# EAGLE board MicroView-ProtoPanel-v01 (EAGLE 6.5.0), part 1 of 4
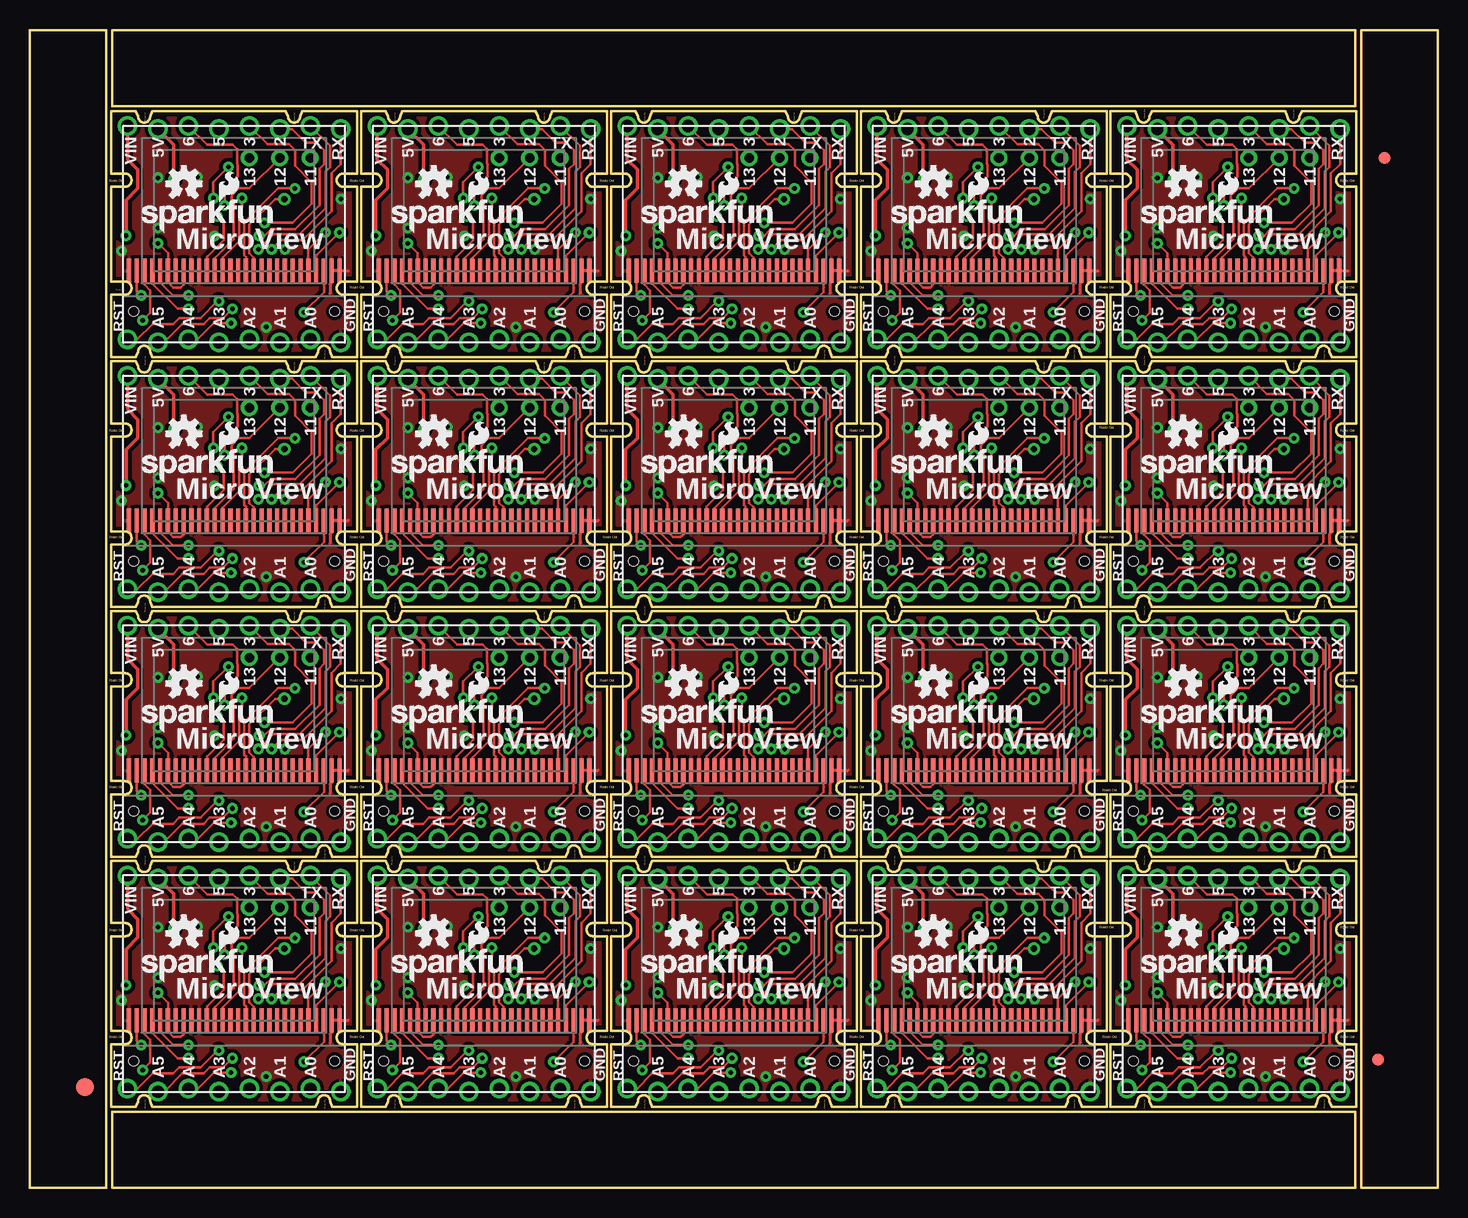
[diagram p0: board, top side]
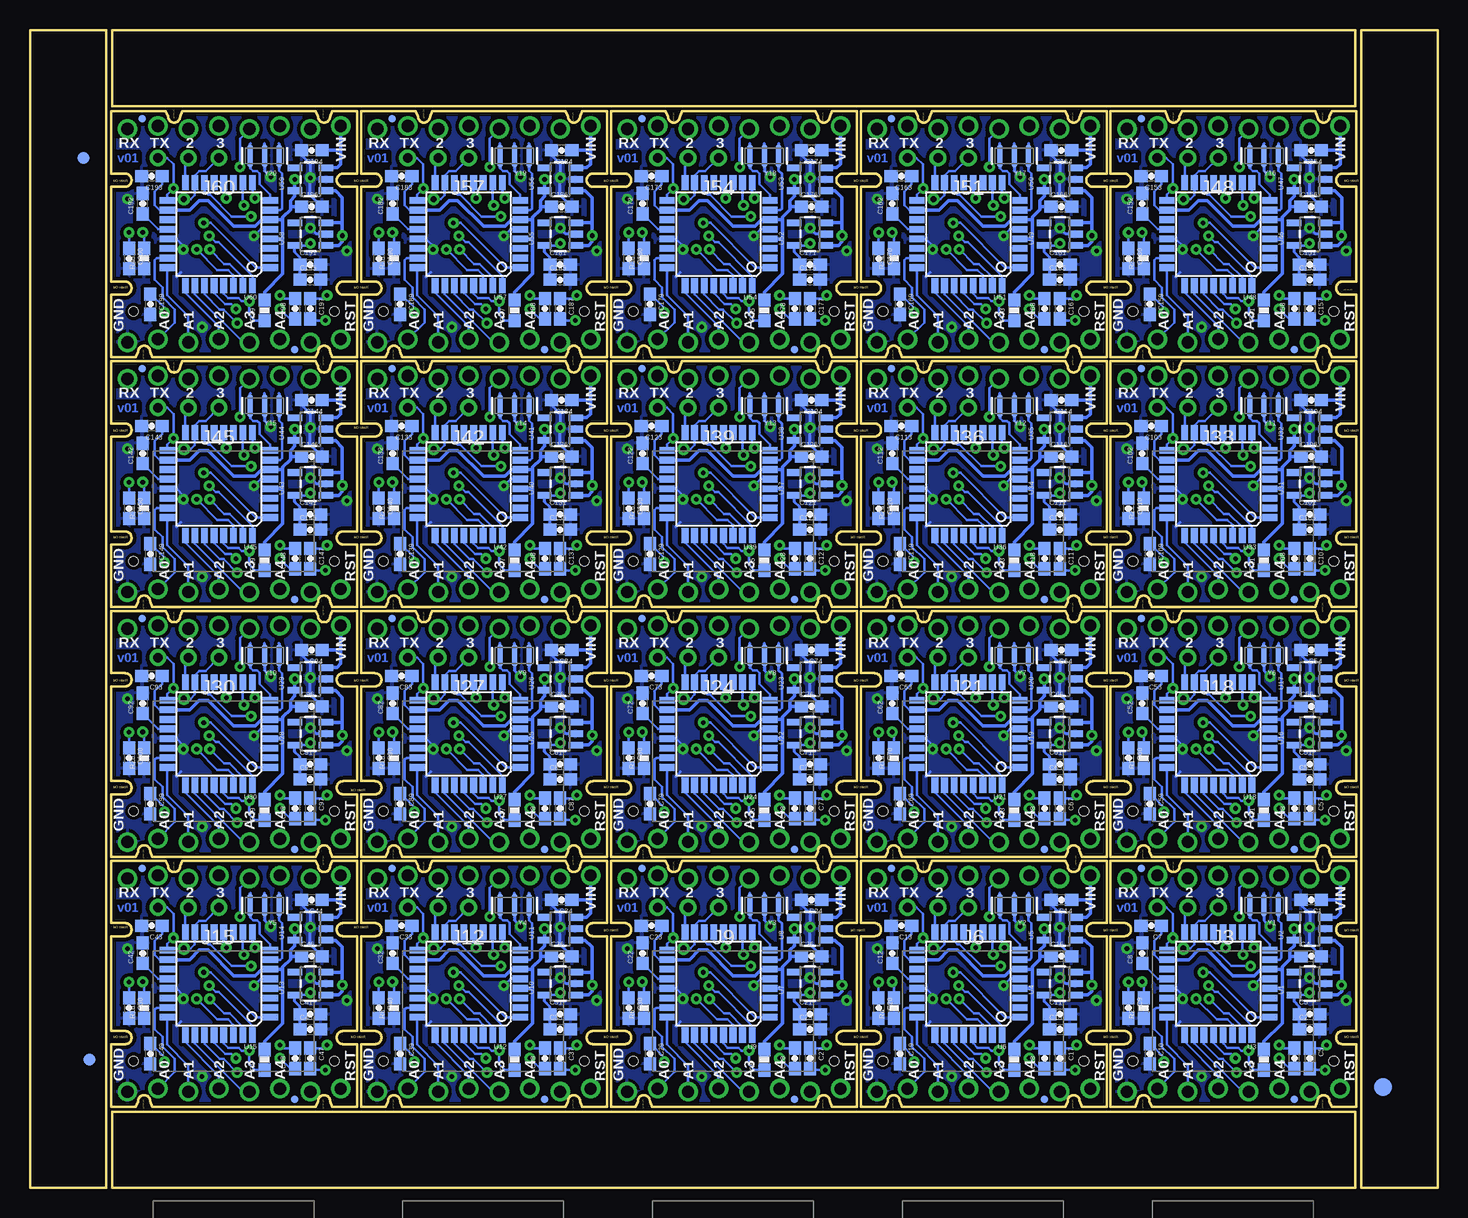
[diagram p1: board, bottom side, seen from below]

Size 117.35 x 96.52 mm. Coordinates in mm from the lower left corner, seen from the top.
Outline: 740 segments
Copper layers (1*16): Top 0.035mm / dielectric 1.5mm / Bottom 0.035mm
Design rules "SparkFun-2-layer *": minimum track width 7mil, minimum drill 15mil, track to track 8mil, track to pad 8mil, pad to pad 8mil, via to via 8mil, smd to smd 8mil, copper to edge 8mil, drill to drill 8mil, minimum pad ring 12mil, minimum via ring 10mil, stop-mask expansion 4mil, vias tented up to drill 20mil, thermal gap 10mil

## Footprints (pad centres in the part's own frame; a part is rotated, then mirrored left to right if it is on the bottom)
0603-CAP = smd 1.1 x 1: 1 -0.85,0; 2 0.85,0
FIDUCIAL-1.5X3 = smd 1.5 x 1.5: 1 0,0
FIDUCIAL-1X2 = smd 1 x 1: 1 0,0
MICRO-FIDUCIAL = smd 0.635 x 0.635: 1 0,0
MV-DIP16 = drill 1.016: 1 -8.89,-8.763; 2 -6.35,-9.017; 3 -3.81,-8.763; 4 -1.27,-9.017; 5 1.27,-8.763; 6 3.81,-9.017; 7 6.35,-8.763; 8 8.89,-9.017; 9 8.89,8.763; 10 6.35,9.017; 11 3.81,8.763; 12 1.27,9.017; 13 -1.27,8.763; 14 -3.81,9.017; 15 -6.35,8.763; 16 -8.89,9.017
1X03_NS_SLIM = drill 0.8: 1 0,0; 2 2.54,0; 3 5.08,0
OLED-0.66-64X48 = smd 0.35 x 2: 1 0,0; 2 0.65,0; 3 1.3,0; 4 1.95,0; 5 2.6,0; 6 3.25,0; 7 3.9,0; 8 4.55,0; 9 5.2,0; 10 5.85,0; 11 6.5,0; 12 7.15,0; 13 7.8,0; 14 8.45,0; 15 9.1,0; 16 9.75,0; 17 10.4,0; 18 11.05,0; 19 11.7,0; 20 12.35,0; 21 13,0; 22 13.65,0; 23 14.3,0; 24 14.95,0; 25 15.6,0; 26 16.25,0; 27 16.9,0; 28 17.55,0 | hole 0.8: 17.15,-3.4; 0.4,-3.4
0603-RES = smd 1.1 x 1: 1 -0.85,0; 2 0.85,0
SOT23-5 = smd 0.55 x 1.2: 1 -0.95,-1.3; 2 0,-1.3; 3 0.95,-1.3; 4 0.95,1.3; 5 -0.95,1.3
TQFP32-08 = smd 1.27 x 0.559: 1 -4.293,2.8; 2 -4.293,2; 3 -4.293,1.2; 4 -4.293,0.4; 5 -4.293,-0.4; 6 -4.293,-1.2; 7 -4.293,-2; 8 -4.293,-2.8; 17 4.293,-2.8; 18 4.293,-2; 19 4.293,-1.2; 20 4.293,-0.4; 21 4.293,0.4; 22 4.293,1.2; 23 4.293,2; 24 4.293,2.8 | smd 0.559 x 1.27: 9 -2.8,-4.293; 10 -2,-4.293; 11 -1.2,-4.293; 12 -0.4,-4.293; 13 0.4,-4.293; 14 1.2,-4.293; 15 2,-4.293; 16 2.8,-4.293; 25 2.8,4.293; 26 2,4.293; 27 1.2,4.293; 28 0.4,4.293; 29 -0.4,4.293; 30 -1.2,4.293; 31 -2,4.293; 32 -2.8,4.293
RESONATOR-SMD = smd 0.45 x 1.905: 1 -1.2,0; 2 0,0; 3 1.2,0

## Placement (x,y rotation side)
C1  1.0uF  [0603-CAP]  10.54,24 180 bottom
C2  1.0uF  [0603-CAP]  10.67,13.21 0 bottom
C3  0.1uF  [0603-CAP]  10.67,14.48 0 bottom
C4  1.0uF  [0603-CAP]  10.54,19.3 0 bottom
C5  1.0uF  [0603-CAP]  10.67,10.79 270 bottom
C6  1.0uF  [0603-CAP]  11.94,10.79 90 bottom
C7  0.1uF  [0603-CAP]  23.88,21.84 180 bottom
C8  0.1uF  [0603-CAP]  24.64,19.56 90 bottom
C9  2.2uF  [0603-CAP]  25.78,14.99 270 bottom
C10  2.2uF  [0603-CAP]  24,11.18 270 bottom
C11  0.1uF  [0603-CAP]  31.5,14.48 0 bottom
C12  0.1uF  [0603-CAP]  45.47,19.56 90 bottom
C13  0.1uF  [0603-CAP]  44.7,21.84 180 bottom
C14  1.0uF  [0603-CAP]  31.37,24 180 bottom
C15  1.0uF  [0603-CAP]  31.5,13.21 0 bottom
C16  1.0uF  [0603-CAP]  31.37,19.3 0 bottom
C17  1.0uF  [0603-CAP]  31.5,10.79 270 bottom
C18  1.0uF  [0603-CAP]  32.77,10.79 90 bottom
C19  2.2uF  [0603-CAP]  44.83,11.18 270 bottom
C20  2.2uF  [0603-CAP]  46.61,14.99 270 bottom
C21  0.1uF  [0603-CAP]  52.32,14.48 0 bottom
C22  0.1uF  [0603-CAP]  66.29,19.56 90 bottom
C23  0.1uF  [0603-CAP]  65.53,21.84 180 bottom
C24  1.0uF  [0603-CAP]  52.2,24 180 bottom
C25  1.0uF  [0603-CAP]  52.32,13.21 0 bottom
C26  1.0uF  [0603-CAP]  52.2,19.3 0 bottom
C27  1.0uF  [0603-CAP]  52.32,10.79 270 bottom
C28  1.0uF  [0603-CAP]  53.59,10.79 90 bottom
C29  2.2uF  [0603-CAP]  65.66,11.18 270 bottom
C30  2.2uF  [0603-CAP]  67.44,14.99 270 bottom
C31  0.1uF  [0603-CAP]  73.15,14.48 0 bottom
C32  0.1uF  [0603-CAP]  87.12,19.56 90 bottom
C33  0.1uF  [0603-CAP]  86.36,21.84 180 bottom
C34  1.0uF  [0603-CAP]  73.03,24 180 bottom
C35  1.0uF  [0603-CAP]  73.15,13.21 0 bottom
C36  1.0uF  [0603-CAP]  73.03,19.3 0 bottom
C37  1.0uF  [0603-CAP]  73.15,10.79 270 bottom
C38  1.0uF  [0603-CAP]  74.42,10.79 90 bottom
C39  2.2uF  [0603-CAP]  86.49,11.18 270 bottom
C40  2.2uF  [0603-CAP]  88.27,14.99 270 bottom
C41  0.1uF  [0603-CAP]  93.98,14.48 0 bottom
C42  0.1uF  [0603-CAP]  107.95,19.56 90 bottom
C43  0.1uF  [0603-CAP]  107.19,21.84 180 bottom
C44  1.0uF  [0603-CAP]  93.85,24 180 bottom
C45  1.0uF  [0603-CAP]  93.98,13.21 0 bottom
C46  1.0uF  [0603-CAP]  93.85,19.3 0 bottom
C47  1.0uF  [0603-CAP]  93.98,10.79 270 bottom
C48  1.0uF  [0603-CAP]  95.25,10.79 90 bottom
C49  2.2uF  [0603-CAP]  107.31,11.18 270 bottom
C50  2.2uF  [0603-CAP]  109.09,14.99 270 bottom
C51  0.1uF  [0603-CAP]  10.67,35.31 0 bottom
C52  0.1uF  [0603-CAP]  24.64,40.39 90 bottom
C53  0.1uF  [0603-CAP]  23.88,42.67 180 bottom
C54  1.0uF  [0603-CAP]  10.54,44.83 180 bottom
C55  1.0uF  [0603-CAP]  10.67,34.04 0 bottom
C56  1.0uF  [0603-CAP]  10.54,40.13 0 bottom
C57  1.0uF  [0603-CAP]  10.67,31.62 270 bottom
C58  1.0uF  [0603-CAP]  11.94,31.62 90 bottom
C59  2.2uF  [0603-CAP]  24,32 270 bottom
C60  2.2uF  [0603-CAP]  25.78,35.81 270 bottom
C61  0.1uF  [0603-CAP]  31.5,35.31 0 bottom
C62  0.1uF  [0603-CAP]  45.47,40.39 90 bottom
C63  0.1uF  [0603-CAP]  44.7,42.67 180 bottom
C64  1.0uF  [0603-CAP]  31.37,44.83 180 bottom
C65  1.0uF  [0603-CAP]  31.5,34.04 0 bottom
C66  1.0uF  [0603-CAP]  31.37,40.13 0 bottom
C67  1.0uF  [0603-CAP]  31.5,31.62 270 bottom
C68  1.0uF  [0603-CAP]  32.77,31.62 90 bottom
C69  2.2uF  [0603-CAP]  44.83,32 270 bottom
C70  2.2uF  [0603-CAP]  46.61,35.81 270 bottom
C71  0.1uF  [0603-CAP]  52.32,35.31 0 bottom
C72  0.1uF  [0603-CAP]  66.29,40.39 90 bottom
C73  0.1uF  [0603-CAP]  65.53,42.67 180 bottom
C74  1.0uF  [0603-CAP]  52.2,44.83 180 bottom
C75  1.0uF  [0603-CAP]  52.32,34.04 0 bottom
C76  1.0uF  [0603-CAP]  52.2,40.13 0 bottom
C77  1.0uF  [0603-CAP]  52.32,31.62 270 bottom
C78  1.0uF  [0603-CAP]  53.59,31.62 90 bottom
C79  2.2uF  [0603-CAP]  65.66,32 270 bottom
C80  2.2uF  [0603-CAP]  67.44,35.81 270 bottom
C81  0.1uF  [0603-CAP]  73.15,35.31 0 bottom
C82  0.1uF  [0603-CAP]  87.12,40.39 90 bottom
C83  0.1uF  [0603-CAP]  86.36,42.67 180 bottom
C84  1.0uF  [0603-CAP]  73.03,44.83 180 bottom
C85  1.0uF  [0603-CAP]  73.15,34.04 0 bottom
C86  1.0uF  [0603-CAP]  73.03,40.13 0 bottom
C87  1.0uF  [0603-CAP]  73.15,31.62 270 bottom
C88  1.0uF  [0603-CAP]  74.42,31.62 90 bottom
C89  2.2uF  [0603-CAP]  86.49,32 270 bottom
C90  2.2uF  [0603-CAP]  88.27,35.81 270 bottom
C91  0.1uF  [0603-CAP]  93.98,35.31 0 bottom
C92  0.1uF  [0603-CAP]  107.95,40.39 90 bottom
C93  0.1uF  [0603-CAP]  107.19,42.67 180 bottom
C94  1.0uF  [0603-CAP]  93.85,44.83 180 bottom
C95  1.0uF  [0603-CAP]  93.98,34.04 0 bottom
C96  1.0uF  [0603-CAP]  93.85,40.13 0 bottom
C97  1.0uF  [0603-CAP]  93.98,31.62 270 bottom
C98  1.0uF  [0603-CAP]  95.25,31.62 90 bottom
C99  2.2uF  [0603-CAP]  107.31,32 270 bottom
C100  2.2uF  [0603-CAP]  109.09,35.81 270 bottom
C101  0.1uF  [0603-CAP]  10.67,56.13 0 bottom
C102  0.1uF  [0603-CAP]  24.64,61.21 90 bottom
C103  0.1uF  [0603-CAP]  23.88,63.5 180 bottom
C104  1.0uF  [0603-CAP]  10.54,65.66 180 bottom
C105  1.0uF  [0603-CAP]  10.67,54.86 0 bottom
C106  1.0uF  [0603-CAP]  10.54,60.96 0 bottom
C107  1.0uF  [0603-CAP]  10.67,52.45 270 bottom
C108  1.0uF  [0603-CAP]  11.94,52.45 90 bottom
C109  2.2uF  [0603-CAP]  24,52.83 270 bottom
C110  2.2uF  [0603-CAP]  25.78,56.64 270 bottom
C111  0.1uF  [0603-CAP]  31.5,56.13 0 bottom
C112  0.1uF  [0603-CAP]  45.47,61.21 90 bottom
C113  0.1uF  [0603-CAP]  44.7,63.5 180 bottom
C114  1.0uF  [0603-CAP]  31.37,65.66 180 bottom
C115  1.0uF  [0603-CAP]  31.5,54.86 0 bottom
C116  1.0uF  [0603-CAP]  31.37,60.96 0 bottom
C117  1.0uF  [0603-CAP]  31.5,52.45 270 bottom
C118  1.0uF  [0603-CAP]  32.77,52.45 90 bottom
C119  2.2uF  [0603-CAP]  44.83,52.83 270 bottom
C120  2.2uF  [0603-CAP]  46.61,56.64 270 bottom
C121  0.1uF  [0603-CAP]  52.32,56.13 0 bottom
C122  0.1uF  [0603-CAP]  66.29,61.21 90 bottom
C123  0.1uF  [0603-CAP]  65.53,63.5 180 bottom
C124  1.0uF  [0603-CAP]  52.2,65.66 180 bottom
C125  1.0uF  [0603-CAP]  52.32,54.86 0 bottom
C126  1.0uF  [0603-CAP]  52.2,60.96 0 bottom
C127  1.0uF  [0603-CAP]  52.32,52.45 270 bottom
C128  1.0uF  [0603-CAP]  53.59,52.45 90 bottom
C129  2.2uF  [0603-CAP]  65.66,52.83 270 bottom
C130  2.2uF  [0603-CAP]  67.44,56.64 270 bottom
C131  0.1uF  [0603-CAP]  73.15,56.13 0 bottom
C132  0.1uF  [0603-CAP]  87.12,61.21 90 bottom
C133  0.1uF  [0603-CAP]  86.36,63.5 180 bottom
C134  1.0uF  [0603-CAP]  73.03,65.66 180 bottom
C135  1.0uF  [0603-CAP]  73.15,54.86 0 bottom
C136  1.0uF  [0603-CAP]  73.03,60.96 0 bottom
C137  1.0uF  [0603-CAP]  73.15,52.45 270 bottom
C138  1.0uF  [0603-CAP]  74.42,52.45 90 bottom
C139  2.2uF  [0603-CAP]  86.49,52.83 270 bottom
C140  2.2uF  [0603-CAP]  88.27,56.64 270 bottom
C141  0.1uF  [0603-CAP]  93.98,56.13 0 bottom
C142  0.1uF  [0603-CAP]  107.95,61.21 90 bottom
C143  0.1uF  [0603-CAP]  107.19,63.5 180 bottom
C144  1.0uF  [0603-CAP]  93.85,65.66 180 bottom
C145  1.0uF  [0603-CAP]  93.98,54.86 0 bottom
C146  1.0uF  [0603-CAP]  93.85,60.96 0 bottom
C147  1.0uF  [0603-CAP]  93.98,52.45 270 bottom
C148  1.0uF  [0603-CAP]  95.25,52.45 90 bottom
C149  2.2uF  [0603-CAP]  107.31,52.83 270 bottom
C150  2.2uF  [0603-CAP]  109.09,56.64 270 bottom
C151  0.1uF  [0603-CAP]  10.67,76.96 0 bottom
C152  0.1uF  [0603-CAP]  24.64,82.04 90 bottom
C153  0.1uF  [0603-CAP]  23.88,84.33 180 bottom
C154  1.0uF  [0603-CAP]  10.54,86.49 180 bottom
C155  1.0uF  [0603-CAP]  10.67,75.69 0 bottom
C156  1.0uF  [0603-CAP]  10.54,81.79 0 bottom
C157  1.0uF  [0603-CAP]  10.67,73.28 270 bottom
C158  1.0uF  [0603-CAP]  11.94,73.28 90 bottom
C159  2.2uF  [0603-CAP]  24,73.66 270 bottom
C160  2.2uF  [0603-CAP]  25.78,77.47 270 bottom
C161  0.1uF  [0603-CAP]  31.5,76.96 0 bottom
C162  0.1uF  [0603-CAP]  45.47,82.04 90 bottom
C163  0.1uF  [0603-CAP]  44.7,84.33 180 bottom
C164  1.0uF  [0603-CAP]  31.37,86.49 180 bottom
C165  1.0uF  [0603-CAP]  31.5,75.69 0 bottom
C166  1.0uF  [0603-CAP]  31.37,81.79 0 bottom
C167  1.0uF  [0603-CAP]  31.5,73.28 270 bottom
C168  1.0uF  [0603-CAP]  32.77,73.28 90 bottom
C169  2.2uF  [0603-CAP]  44.83,73.66 270 bottom
C170  2.2uF  [0603-CAP]  46.61,77.47 270 bottom
C171  0.1uF  [0603-CAP]  52.32,76.96 0 bottom
C172  0.1uF  [0603-CAP]  66.29,82.04 90 bottom
C173  0.1uF  [0603-CAP]  65.53,84.33 180 bottom
C174  1.0uF  [0603-CAP]  52.2,86.49 180 bottom
C175  1.0uF  [0603-CAP]  52.32,75.69 0 bottom
C176  1.0uF  [0603-CAP]  52.2,81.79 0 bottom
C177  1.0uF  [0603-CAP]  52.32,73.28 270 bottom
C178  1.0uF  [0603-CAP]  53.59,73.28 90 bottom
C179  2.2uF  [0603-CAP]  65.66,73.66 270 bottom
C180  2.2uF  [0603-CAP]  67.44,77.47 270 bottom
C181  0.1uF  [0603-CAP]  73.15,76.96 0 bottom
C182  0.1uF  [0603-CAP]  87.12,82.04 90 bottom
C183  0.1uF  [0603-CAP]  86.36,84.33 180 bottom
C184  1.0uF  [0603-CAP]  73.03,86.49 180 bottom
C185  1.0uF  [0603-CAP]  73.15,75.69 0 bottom
C186  1.0uF  [0603-CAP]  73.03,81.79 0 bottom
C187  1.0uF  [0603-CAP]  73.15,73.28 270 bottom
C188  1.0uF  [0603-CAP]  74.42,73.28 90 bottom
C189  2.2uF  [0603-CAP]  86.49,73.66 270 bottom
C190  2.2uF  [0603-CAP]  88.27,77.47 270 bottom
C191  0.1uF  [0603-CAP]  93.98,76.96 0 bottom
C192  0.1uF  [0603-CAP]  107.95,82.04 90 bottom
C193  0.1uF  [0603-CAP]  107.19,84.33 180 bottom
C194  1.0uF  [0603-CAP]  93.85,86.49 180 bottom
C195  1.0uF  [0603-CAP]  93.98,75.69 0 bottom
C196  1.0uF  [0603-CAP]  93.85,81.79 0 bottom
C197  1.0uF  [0603-CAP]  93.98,73.28 270 bottom
C198  1.0uF  [0603-CAP]  95.25,73.28 90 bottom
C199  2.2uF  [0603-CAP]  107.31,73.66 270 bottom
C200  2.2uF  [0603-CAP]  109.09,77.47 270 bottom
E$1  [FIDUCIAL-1.5X3]  4.57,8.38 0 top
E$2  [FIDUCIAL-1.5X3]  4.57,8.38 0 bottom
E$3  [FIDUCIAL-1X2]  112.39,10.67 0 bottom
E$4  [FIDUCIAL-1X2]  112.39,10.67 0 top
E$5  [FIDUCIAL-1X2]  112.9,85.85 180 top
E$6  [FIDUCIAL-1X2]  112.9,85.85 180 bottom
FID1  FIDUCIALUFIDUCIAL  [MICRO-FIDUCIAL]  24.69,26.64 0 bottom
FID2  FIDUCIALUFIDUCIAL  [MICRO-FIDUCIAL]  45.52,26.64 0 bottom
FID3  FIDUCIALUFIDUCIAL  [MICRO-FIDUCIAL]  11.96,7.39 0 bottom
FID4  FIDUCIALUFIDUCIAL  [MICRO-FIDUCIAL]  32.79,7.39 0 bottom
FID5  FIDUCIALUFIDUCIAL  [MICRO-FIDUCIAL]  66.34,26.64 0 bottom
FID6  FIDUCIALUFIDUCIAL  [MICRO-FIDUCIAL]  53.62,7.39 0 bottom
FID7  FIDUCIALUFIDUCIAL  [MICRO-FIDUCIAL]  87.17,26.64 0 bottom
FID8  FIDUCIALUFIDUCIAL  [MICRO-FIDUCIAL]  74.45,7.39 0 bottom
FID9  FIDUCIALUFIDUCIAL  [MICRO-FIDUCIAL]  108,26.64 0 bottom
FID10  FIDUCIALUFIDUCIAL  [MICRO-FIDUCIAL]  95.28,7.39 0 bottom
FID11  FIDUCIALUFIDUCIAL  [MICRO-FIDUCIAL]  24.69,47.47 0 bottom
FID12  FIDUCIALUFIDUCIAL  [MICRO-FIDUCIAL]  11.96,28.22 0 bottom
FID13  FIDUCIALUFIDUCIAL  [MICRO-FIDUCIAL]  45.52,47.47 0 bottom
FID14  FIDUCIALUFIDUCIAL  [MICRO-FIDUCIAL]  32.79,28.22 0 bottom
FID15  FIDUCIALUFIDUCIAL  [MICRO-FIDUCIAL]  66.34,47.47 0 bottom
FID16  FIDUCIALUFIDUCIAL  [MICRO-FIDUCIAL]  53.62,28.22 0 bottom
FID17  FIDUCIALUFIDUCIAL  [MICRO-FIDUCIAL]  87.17,47.47 0 bottom
FID18  FIDUCIALUFIDUCIAL  [MICRO-FIDUCIAL]  74.45,28.22 0 bottom
FID19  FIDUCIALUFIDUCIAL  [MICRO-FIDUCIAL]  108,47.47 0 bottom
FID20  FIDUCIALUFIDUCIAL  [MICRO-FIDUCIAL]  95.28,28.22 0 bottom
FID21  FIDUCIALUFIDUCIAL  [MICRO-FIDUCIAL]  24.69,68.3 0 bottom
FID22  FIDUCIALUFIDUCIAL  [MICRO-FIDUCIAL]  11.96,49.05 0 bottom
FID23  FIDUCIALUFIDUCIAL  [MICRO-FIDUCIAL]  45.52,68.3 0 bottom
FID24  FIDUCIALUFIDUCIAL  [MICRO-FIDUCIAL]  32.79,49.05 0 bottom
FID25  FIDUCIALUFIDUCIAL  [MICRO-FIDUCIAL]  66.34,68.3 0 bottom
FID26  FIDUCIALUFIDUCIAL  [MICRO-FIDUCIAL]  53.62,49.05 0 bottom
FID27  FIDUCIALUFIDUCIAL  [MICRO-FIDUCIAL]  87.17,68.3 0 bottom
FID28  FIDUCIALUFIDUCIAL  [MICRO-FIDUCIAL]  74.45,49.05 0 bottom
FID29  FIDUCIALUFIDUCIAL  [MICRO-FIDUCIAL]  108,68.3 0 bottom
FID30  FIDUCIALUFIDUCIAL  [MICRO-FIDUCIAL]  95.28,49.05 0 bottom
FID31  FIDUCIALUFIDUCIAL  [MICRO-FIDUCIAL]  24.69,89.13 0 bottom
FID32  FIDUCIALUFIDUCIAL  [MICRO-FIDUCIAL]  11.96,69.88 0 bottom
FID33  FIDUCIALUFIDUCIAL  [MICRO-FIDUCIAL]  45.52,89.13 0 bottom
FID34  FIDUCIALUFIDUCIAL  [MICRO-FIDUCIAL]  32.79,69.88 0 bottom
FID35  FIDUCIALUFIDUCIAL  [MICRO-FIDUCIAL]  66.34,89.13 0 bottom
FID36  FIDUCIALUFIDUCIAL  [MICRO-FIDUCIAL]  53.62,69.88 0 bottom
FID37  FIDUCIALUFIDUCIAL  [MICRO-FIDUCIAL]  87.17,89.13 0 bottom
FID38  FIDUCIALUFIDUCIAL  [MICRO-FIDUCIAL]  74.45,69.88 0 bottom
FID39  FIDUCIALUFIDUCIAL  [MICRO-FIDUCIAL]  108,89.13 0 bottom
FID40  FIDUCIALUFIDUCIAL  [MICRO-FIDUCIAL]  95.28,69.88 0 bottom
J1  OLED_SCREEN  [OLED-SCREEN]  17.02,17.02 0 top
J2  MICROVIEW-16  [MV-DIP16]  17.02,17.02 0 top
J3  M03NS_SLIM  [1X03_NS_SLIM]  18.29,23.37 180 bottom
J4  MICROVIEW-16  [MV-DIP16]  37.85,17.02 0 top
J5  OLED_SCREEN  [OLED-SCREEN]  37.85,17.02 0 top
J6  M03NS_SLIM  [1X03_NS_SLIM]  39.12,23.37 180 bottom
J7  MICROVIEW-16  [MV-DIP16]  58.67,17.02 0 top
J8  OLED_SCREEN  [OLED-SCREEN]  58.67,17.02 0 top
J9  M03NS_SLIM  [1X03_NS_SLIM]  59.94,23.37 180 bottom
J10  MICROVIEW-16  [MV-DIP16]  79.5,17.02 0 top
J11  OLED_SCREEN  [OLED-SCREEN]  79.5,17.02 0 top
J12  M03NS_SLIM  [1X03_NS_SLIM]  80.77,23.37 180 bottom
J13  MICROVIEW-16  [MV-DIP16]  100.33,17.02 0 top
J14  OLED_SCREEN  [OLED-SCREEN]  100.33,17.02 0 top
J15  M03NS_SLIM  [1X03_NS_SLIM]  101.6,23.37 180 bottom
J16  MICROVIEW-16  [MV-DIP16]  17.02,37.85 0 top
J17  OLED_SCREEN  [OLED-SCREEN]  17.02,37.85 0 top
J18  M03NS_SLIM  [1X03_NS_SLIM]  18.29,44.2 180 bottom
J19  MICROVIEW-16  [MV-DIP16]  37.85,37.85 0 top
J20  OLED_SCREEN  [OLED-SCREEN]  37.85,37.85 0 top
J21  M03NS_SLIM  [1X03_NS_SLIM]  39.12,44.2 180 bottom
J22  MICROVIEW-16  [MV-DIP16]  58.67,37.85 0 top
J23  OLED_SCREEN  [OLED-SCREEN]  58.67,37.85 0 top
J24  M03NS_SLIM  [1X03_NS_SLIM]  59.94,44.2 180 bottom
J25  MICROVIEW-16  [MV-DIP16]  79.5,37.85 0 top
J26  OLED_SCREEN  [OLED-SCREEN]  79.5,37.85 0 top
J27  M03NS_SLIM  [1X03_NS_SLIM]  80.77,44.2 180 bottom
J28  MICROVIEW-16  [MV-DIP16]  100.33,37.85 0 top
J29  OLED_SCREEN  [OLED-SCREEN]  100.33,37.85 0 top
J30  M03NS_SLIM  [1X03_NS_SLIM]  101.6,44.2 180 bottom
J31  MICROVIEW-16  [MV-DIP16]  17.02,58.67 0 top
J32  OLED_SCREEN  [OLED-SCREEN]  17.02,58.67 0 top
J33  M03NS_SLIM  [1X03_NS_SLIM]  18.29,65.02 180 bottom
J34  MICROVIEW-16  [MV-DIP16]  37.85,58.67 0 top
J35  OLED_SCREEN  [OLED-SCREEN]  37.85,58.67 0 top
J36  M03NS_SLIM  [1X03_NS_SLIM]  39.12,65.02 180 bottom
J37  MICROVIEW-16  [MV-DIP16]  58.67,58.67 0 top
J38  OLED_SCREEN  [OLED-SCREEN]  58.67,58.67 0 top
J39  M03NS_SLIM  [1X03_NS_SLIM]  59.94,65.02 180 bottom
J40  MICROVIEW-16  [MV-DIP16]  79.5,58.67 0 top
J41  OLED_SCREEN  [OLED-SCREEN]  79.5,58.67 0 top
J42  M03NS_SLIM  [1X03_NS_SLIM]  80.77,65.02 180 bottom
J43  MICROVIEW-16  [MV-DIP16]  100.33,58.67 0 top
J44  OLED_SCREEN  [OLED-SCREEN]  100.33,58.67 0 top
J45  M03NS_SLIM  [1X03_NS_SLIM]  101.6,65.02 180 bottom
J46  MICROVIEW-16  [MV-DIP16]  17.02,79.5 0 top
J47  OLED_SCREEN  [OLED-SCREEN]  17.02,79.5 0 top
J48  M03NS_SLIM  [1X03_NS_SLIM]  18.29,85.85 180 bottom
J49  MICROVIEW-16  [MV-DIP16]  37.85,79.5 0 top
J50  OLED_SCREEN  [OLED-SCREEN]  37.85,79.5 0 top
J51  M03NS_SLIM  [1X03_NS_SLIM]  39.12,85.85 180 bottom
J52  MICROVIEW-16  [MV-DIP16]  58.67,79.5 0 top
J53  OLED_SCREEN  [OLED-SCREEN]  58.67,79.5 0 top
J54  M03NS_SLIM  [1X03_NS_SLIM]  59.94,85.85 180 bottom
J55  MICROVIEW-16  [MV-DIP16]  79.5,79.5 0 top
J56  OLED_SCREEN  [OLED-SCREEN]  79.5,79.5 0 top
J57  M03NS_SLIM  [1X03_NS_SLIM]  80.77,85.85 180 bottom
J58  MICROVIEW-16  [MV-DIP16]  100.33,79.5 0 top
J59  OLED_SCREEN  [OLED-SCREEN]  100.33,79.5 0 top
J60  M03NS_SLIM  [1X03_NS_SLIM]  101.6,85.85 180 bottom
LOGO1  OSHW-LOGOS  [OSHW-LOGO-S]  12.83,21.21 0 top
LOGO2  OSHW-LOGOS  [OSHW-LOGO-S]  33.66,21.21 0 top
LOGO3  SFE_LOGO_NAME_FLAME.1_INCH  [SFE_LOGO_NAME_FLAME_.1]  29.72,17.02 0 top
LOGO4  SFE_LOGO_NAME_FLAME.1_INCH  [SFE_LOGO_NAME_FLAME_.1]  8.89,17.02 0 top
LOGO5  OSHW-LOGOS  [OSHW-LOGO-S]  54.48,21.21 0 top
LOGO6  SFE_LOGO_NAME_FLAME.1_INCH  [SFE_LOGO_NAME_FLAME_.1]  50.55,17.02 0 top
LOGO7  OSHW-LOGOS  [OSHW-LOGO-S]  75.31,21.21 0 top
LOGO8  SFE_LOGO_NAME_FLAME.1_INCH  [SFE_LOGO_NAME_FLAME_.1]  71.37,17.02 0 top
LOGO9  OSHW-LOGOS  [OSHW-LOGO-S]  96.14,21.21 0 top
LOGO10  SFE_LOGO_NAME_FLAME.1_INCH  [SFE_LOGO_NAME_FLAME_.1]  92.2,17.02 0 top
LOGO11  OSHW-LOGOS  [OSHW-LOGO-S]  12.83,42.04 0 top
LOGO12  SFE_LOGO_NAME_FLAME.1_INCH  [SFE_LOGO_NAME_FLAME_.1]  8.89,37.85 0 top
LOGO13  OSHW-LOGOS  [OSHW-LOGO-S]  33.66,42.04 0 top
LOGO14  SFE_LOGO_NAME_FLAME.1_INCH  [SFE_LOGO_NAME_FLAME_.1]  29.72,37.85 0 top
LOGO15  OSHW-LOGOS  [OSHW-LOGO-S]  54.48,42.04 0 top
LOGO16  SFE_LOGO_NAME_FLAME.1_INCH  [SFE_LOGO_NAME_FLAME_.1]  50.55,37.85 0 top
LOGO17  OSHW-LOGOS  [OSHW-LOGO-S]  75.31,42.04 0 top
LOGO18  SFE_LOGO_NAME_FLAME.1_INCH  [SFE_LOGO_NAME_FLAME_.1]  71.37,37.85 0 top
LOGO19  OSHW-LOGOS  [OSHW-LOGO-S]  96.14,42.04 0 top
LOGO20  SFE_LOGO_NAME_FLAME.1_INCH  [SFE_LOGO_NAME_FLAME_.1]  92.2,37.85 0 top
LOGO21  OSHW-LOGOS  [OSHW-LOGO-S]  12.83,62.87 0 top
LOGO22  SFE_LOGO_NAME_FLAME.1_INCH  [SFE_LOGO_NAME_FLAME_.1]  8.89,58.67 0 top
LOGO23  OSHW-LOGOS  [OSHW-LOGO-S]  33.66,62.87 0 top
LOGO24  SFE_LOGO_NAME_FLAME.1_INCH  [SFE_LOGO_NAME_FLAME_.1]  29.72,58.67 0 top
LOGO25  OSHW-LOGOS  [OSHW-LOGO-S]  54.48,62.87 0 top
LOGO26  SFE_LOGO_NAME_FLAME.1_INCH  [SFE_LOGO_NAME_FLAME_.1]  50.55,58.67 0 top
LOGO27  OSHW-LOGOS  [OSHW-LOGO-S]  75.31,62.87 0 top
LOGO28  SFE_LOGO_NAME_FLAME.1_INCH  [SFE_LOGO_NAME_FLAME_.1]  71.37,58.67 0 top
LOGO29  OSHW-LOGOS  [OSHW-LOGO-S]  96.14,62.87 0 top
LOGO30  SFE_LOGO_NAME_FLAME.1_INCH  [SFE_LOGO_NAME_FLAME_.1]  92.2,58.67 0 top
LOGO31  OSHW-LOGOS  [OSHW-LOGO-S]  12.83,83.69 0 top
LOGO32  SFE_LOGO_NAME_FLAME.1_INCH  [SFE_LOGO_NAME_FLAME_.1]  8.89,79.5 0 top
LOGO33  OSHW-LOGOS  [OSHW-LOGO-S]  33.66,83.69 0 top
LOGO34  SFE_LOGO_NAME_FLAME.1_INCH  [SFE_LOGO_NAME_FLAME_.1]  29.72,79.5 0 top
LOGO35  OSHW-LOGOS  [OSHW-LOGO-S]  54.48,83.69 0 top
LOGO36  SFE_LOGO_NAME_FLAME.1_INCH  [SFE_LOGO_NAME_FLAME_.1]  50.55,79.5 0 top
LOGO37  OSHW-LOGOS  [OSHW-LOGO-S]  75.31,83.69 0 top
LOGO38  SFE_LOGO_NAME_FLAME.1_INCH  [SFE_LOGO_NAME_FLAME_.1]  71.37,79.5 0 top
LOGO39  OSHW-LOGOS  [OSHW-LOGO-S]  96.14,83.69 0 top
LOGO40  SFE_LOGO_NAME_FLAME.1_INCH  [SFE_LOGO_NAME_FLAME_.1]  92.2,79.5 0 top
OLED1  OLED0.66  [OLED-0.66-64X48]  8.26,13.97 0 top
OLED2  OLED0.66  [OLED-0.66-64X48]  29.08,13.97 0 top
OLED3  OLED0.66  [OLED-0.66-64X48]  49.91,13.97 0 top
OLED4  OLED0.66  [OLED-0.66-64X48]  70.74,13.97 0 top
OLED5  OLED0.66  [OLED-0.66-64X48]  91.57,13.97 0 top
OLED6  OLED0.66  [OLED-0.66-64X48]  8.26,34.8 0 top
OLED7  OLED0.66  [OLED-0.66-64X48]  29.08,34.8 0 top
OLED8  OLED0.66  [OLED-0.66-64X48]  49.91,34.8 0 top
OLED9  OLED0.66  [OLED-0.66-64X48]  70.74,34.8 0 top
OLED10  OLED0.66  [OLED-0.66-64X48]  91.57,34.8 0 top
OLED11  OLED0.66  [OLED-0.66-64X48]  8.26,55.63 0 top
OLED12  OLED0.66  [OLED-0.66-64X48]  29.08,55.63 0 top
OLED13  OLED0.66  [OLED-0.66-64X48]  49.91,55.63 0 top
OLED14  OLED0.66  [OLED-0.66-64X48]  70.74,55.63 0 top
OLED15  OLED0.66  [OLED-0.66-64X48]  91.57,55.63 0 top
OLED16  OLED0.66  [OLED-0.66-64X48]  8.26,76.45 0 top
OLED17  OLED0.66  [OLED-0.66-64X48]  29.08,76.45 0 top
OLED18  OLED0.66  [OLED-0.66-64X48]  49.91,76.45 0 top
OLED19  OLED0.66  [OLED-0.66-64X48]  70.74,76.45 0 top
OLED20  OLED0.66  [OLED-0.66-64X48]  91.57,76.45 0 top
R1  10K  [0603-RES]  14.48,10.67 90 bottom
R2  390k  [0603-RES]  24.51,14.99 90 bottom
R3  10K  [0603-RES]  35.31,10.67 90 bottom
R4  390k  [0603-RES]  45.34,14.99 90 bottom
R5  10K  [0603-RES]  56.13,10.67 90 bottom
R6  390k  [0603-RES]  66.17,14.99 90 bottom
R7  10K  [0603-RES]  76.96,10.67 90 bottom
R8  390k  [0603-RES]  87,14.99 90 bottom
R9  10K  [0603-RES]  97.79,10.67 90 bottom
R10  390k  [0603-RES]  107.82,14.99 90 bottom
R11  10K  [0603-RES]  14.48,31.5 90 bottom
R12  390k  [0603-RES]  24.51,35.81 90 bottom
R13  10K  [0603-RES]  35.31,31.5 90 bottom
R14  390k  [0603-RES]  45.34,35.81 90 bottom
R15  10K  [0603-RES]  56.13,31.5 90 bottom
R16  390k  [0603-RES]  66.17,35.81 90 bottom
R17  10K  [0603-RES]  76.96,31.5 90 bottom
R18  390k  [0603-RES]  87,35.81 90 bottom
R19  10K  [0603-RES]  97.79,31.5 90 bottom
R20  390k  [0603-RES]  107.82,35.81 90 bottom
R21  10K  [0603-RES]  14.48,52.32 90 bottom
R22  390k  [0603-RES]  24.51,56.64 90 bottom
R23  10K  [0603-RES]  35.31,52.32 90 bottom
R24  390k  [0603-RES]  45.34,56.64 90 bottom
R25  10K  [0603-RES]  56.13,52.32 90 bottom
R26  390k  [0603-RES]  66.17,56.64 90 bottom
R27  10K  [0603-RES]  76.96,52.32 90 bottom
R28  390k  [0603-RES]  87,56.64 90 bottom
R29  10K  [0603-RES]  97.79,52.32 90 bottom
R30  390k  [0603-RES]  107.82,56.64 90 bottom
R31  10K  [0603-RES]  14.48,73.15 90 bottom
R32  390k  [0603-RES]  24.51,77.47 90 bottom
R33  10K  [0603-RES]  35.31,73.15 90 bottom
R34  390k  [0603-RES]  45.34,77.47 90 bottom
R35  10K  [0603-RES]  56.13,73.15 90 bottom
R36  390k  [0603-RES]  66.17,77.47 90 bottom
R37  10K  [0603-RES]  76.96,73.15 90 bottom
R38  390k  [0603-RES]  87,77.47 90 bottom
R39  10K  [0603-RES]  97.79,73.15 90 bottom
R40  390k  [0603-RES]  107.82,77.47 90 bottom
U1  MIC5205 3.3V  [SOT23-5]  10.67,17.02 90 bottom
U2  SPX3819M5-L-5-0  [SOT23-5]  10.67,21.59 90 bottom
U3  ATMEGA328P  [TQFP32-08]  18.29,17.02 180 bottom
U4  MIC5205 3.3V  [SOT23-5]  31.5,17.02 90 bottom
U5  SPX3819M5-L-5-0  [SOT23-5]  31.5,21.59 90 bottom
U6  ATMEGA328P  [TQFP32-08]  39.12,17.02 180 bottom
U7  MIC5205 3.3V  [SOT23-5]  52.32,17.02 90 bottom
U8  SPX3819M5-L-5-0  [SOT23-5]  52.32,21.59 90 bottom
U9  ATMEGA328P  [TQFP32-08]  59.94,17.02 180 bottom
U10  MIC5205 3.3V  [SOT23-5]  73.15,17.02 90 bottom
U11  SPX3819M5-L-5-0  [SOT23-5]  73.15,21.59 90 bottom
U12  ATMEGA328P  [TQFP32-08]  80.77,17.02 180 bottom
U13  MIC5205 3.3V  [SOT23-5]  93.98,17.02 90 bottom
U14  SPX3819M5-L-5-0  [SOT23-5]  93.98,21.59 90 bottom
U15  ATMEGA328P  [TQFP32-08]  101.6,17.02 180 bottom
U16  MIC5205 3.3V  [SOT23-5]  10.67,37.85 90 bottom
U17  SPX3819M5-L-5-0  [SOT23-5]  10.67,42.42 90 bottom
U18  ATMEGA328P  [TQFP32-08]  18.29,37.85 180 bottom
U19  MIC5205 3.3V  [SOT23-5]  31.5,37.85 90 bottom
U20  SPX3819M5-L-5-0  [SOT23-5]  31.5,42.42 90 bottom
U21  ATMEGA328P  [TQFP32-08]  39.12,37.85 180 bottom
U22  MIC5205 3.3V  [SOT23-5]  52.32,37.85 90 bottom
U23  SPX3819M5-L-5-0  [SOT23-5]  52.32,42.42 90 bottom
U24  ATMEGA328P  [TQFP32-08]  59.94,37.85 180 bottom
U25  MIC5205 3.3V  [SOT23-5]  73.15,37.85 90 bottom
U26  SPX3819M5-L-5-0  [SOT23-5]  73.15,42.42 90 bottom
U27  ATMEGA328P  [TQFP32-08]  80.77,37.85 180 bottom
U28  MIC5205 3.3V  [SOT23-5]  93.98,37.85 90 bottom
U29  SPX3819M5-L-5-0  [SOT23-5]  93.98,42.42 90 bottom
U30  ATMEGA328P  [TQFP32-08]  101.6,37.85 180 bottom
U31  MIC5205 3.3V  [SOT23-5]  10.67,58.67 90 bottom
U32  SPX3819M5-L-5-0  [SOT23-5]  10.67,63.25 90 bottom
U33  ATMEGA328P  [TQFP32-08]  18.29,58.67 180 bottom
U34  MIC5205 3.3V  [SOT23-5]  31.5,58.67 90 bottom
U35  SPX3819M5-L-5-0  [SOT23-5]  31.5,63.25 90 bottom
U36  ATMEGA328P  [TQFP32-08]  39.12,58.67 180 bottom
U37  MIC5205 3.3V  [SOT23-5]  52.32,58.67 90 bottom
U38  SPX3819M5-L-5-0  [SOT23-5]  52.32,63.25 90 bottom
U39  ATMEGA328P  [TQFP32-08]  59.94,58.67 180 bottom
U40  MIC5205 3.3V  [SOT23-5]  73.15,58.67 90 bottom
U41  SPX3819M5-L-5-0  [SOT23-5]  73.15,63.25 90 bottom
U42  ATMEGA328P  [TQFP32-08]  80.77,58.67 180 bottom
U43  MIC5205 3.3V  [SOT23-5]  93.98,58.67 90 bottom
U44  SPX3819M5-L-5-0  [SOT23-5]  93.98,63.25 90 bottom
U45  ATMEGA328P  [TQFP32-08]  101.6,58.67 180 bottom
U46  MIC5205 3.3V  [SOT23-5]  10.67,79.5 90 bottom
U47  SPX3819M5-L-5-0  [SOT23-5]  10.67,84.07 90 bottom
U48  ATMEGA328P  [TQFP32-08]  18.29,79.5 180 bottom
U49  MIC5205 3.3V  [SOT23-5]  31.5,79.5 90 bottom
U50  SPX3819M5-L-5-0  [SOT23-5]  31.5,84.07 90 bottom
U51  ATMEGA328P  [TQFP32-08]  39.12,79.5 180 bottom
U52  MIC5205 3.3V  [SOT23-5]  52.32,79.5 90 bottom
U53  SPX3819M5-L-5-0  [SOT23-5]  52.32,84.07 90 bottom
U54  ATMEGA328P  [TQFP32-08]  59.94,79.5 180 bottom
U55  MIC5205 3.3V  [SOT23-5]  73.15,79.5 90 bottom
U56  SPX3819M5-L-5-0  [SOT23-5]  73.15,84.07 90 bottom
U57  ATMEGA328P  [TQFP32-08]  80.77,79.5 180 bottom
U58  MIC5205 3.3V  [SOT23-5]  93.98,79.5 90 bottom
U59  SPX3819M5-L-5-0  [SOT23-5]  93.98,84.07 90 bottom
U60  ATMEGA328P  [TQFP32-08]  101.6,79.5 180 bottom
Y1  16MHz  [RESONATOR-SMD]  14.48,23.55 180 bottom
Y2  16MHz  [RESONATOR-SMD]  35.31,23.55 180 bottom
Y3  16MHz  [RESONATOR-SMD]  56.13,23.55 180 bottom
Y4  16MHz  [RESONATOR-SMD]  76.96,23.55 180 bottom
Y5  16MHz  [RESONATOR-SMD]  97.79,23.55 180 bottom
Y6  16MHz  [RESONATOR-SMD]  14.48,44.37 180 bottom
Y7  16MHz  [RESONATOR-SMD]  35.31,44.37 180 bottom
Y8  16MHz  [RESONATOR-SMD]  56.13,44.37 180 bottom
Y9  16MHz  [RESONATOR-SMD]  76.96,44.37 180 bottom
Y10  16MHz  [RESONATOR-SMD]  97.79,44.37 180 bottom
Y11  16MHz  [RESONATOR-SMD]  14.48,65.2 180 bottom
Y12  16MHz  [RESONATOR-SMD]  35.31,65.2 180 bottom
Y13  16MHz  [RESONATOR-SMD]  56.13,65.2 180 bottom
Y14  16MHz  [RESONATOR-SMD]  76.96,65.2 180 bottom
Y15  16MHz  [RESONATOR-SMD]  97.79,65.2 180 bottom
Y16  16MHz  [RESONATOR-SMD]  14.48,86.03 180 bottom
Y17  16MHz  [RESONATOR-SMD]  35.31,86.03 180 bottom
Y18  16MHz  [RESONATOR-SMD]  56.13,86.03 180 bottom
Y19  16MHz  [RESONATOR-SMD]  76.96,86.03 180 bottom
Y20  16MHz  [RESONATOR-SMD]  97.79,86.03 180 bottom

## Library data of the parts
C1 C2 C4-C6 C14-C18 C24-C28 C34-C38 C44-C48 C54-C58 C64-C68 C74-C78 C84-C88 C94-C98 C104-C108 C114-C118 C124-C128 C134-C138 C144-C148 C154-C158 C164-C168 C174-C178 C184-C188 C194-C198 = SparkFun-Capacitors; PROD_ID: CAP-00868
C3 C7 C8 C11-C13 C21-C23 C31-C33 C41-C43 C51-C53 C61-C63 C71-C73 C81-C83 C91-C93 C101-C103 C111-C113 C121-C123 C131-C133 C141-C143 C151-C153 C161-C163 C171-C173 C181-C183 C191-C193 = SparkFun-Capacitors; PROD_ID: CAP-00810
C9 C10 C19 C20 C29 C30 C39 C40 C49 C50 C59 C60 C69 C70 C79 C80 C89 C90 C99 C100 C109 C110 C119 C120 C129 C130 C139 C140 C149 C150 C159 C160 C169 C170 C179 C180 C189 C190 C199 C200 = SparkFun-Capacitors; PROD_ID: CAP-07888
E$1 E$2 = SparkFun-Retired
E$3-E$6 FID1-FID40 LOGO1-LOGO40 = SparkFun-Aesthetics
J1-J60 OLED1-OLED20 = microView-temp
R1 R3 R5 R7 R9 R11 R13 R15 R17 R19 R21 R23 R25 R27 R29 R31 R33 R35 R37 R39 = SparkFun-Resistors; PROD_ID: RES-00824
R2 R4 R6 R8 R10 R12 R14 R16 R18 R20 R22 R24 R26 R28 R30 R32 R34 R36 R38 R40 = SparkFun-Resistors
U1 U4 U7 U10 U13 U16 U19 U22 U25 U28 U31 U34 U37 U40 U43 U46 U49 U52 U55 U58 = SparkFun-PowerIC; PROD_ID: VREG-00822
U2 U5 U8 U11 U14 U17 U20 U23 U26 U29 U32 U35 U38 U41 U44 U47 U50 U53 U56 U59 = SparkFun-PowerIC; PROD_ID: VREG-10107
U3 U6 U9 U12 U15 U18 U21 U24 U27 U30 U33 U36 U39 U42 U45 U48 U51 U54 U57 U60 = SparkFun-DigitalIC; PROD_ID: IC-09069
Y1-Y20 = SparkFun-FreqCtrl; PROD_ID: XTAL-08900

## Nets
3.3V: C2.1 C3.1 OLED1.6 OLED1.8 U1.5
3.3V1: C11.1 C15.1 OLED2.6 OLED2.8 U4.5
3.3V2: C21.1 C25.1 OLED3.6 OLED3.8 U7.5
3.3V3: C31.1 C35.1 OLED4.6 OLED4.8 U10.5
3.3V4: C41.1 C45.1 OLED5.6 OLED5.8 U13.5
3.3V5: C51.1 C55.1 OLED6.6 OLED6.8 U16.5
3.3V6: C61.1 C65.1 OLED7.6 OLED7.8 U19.5
3.3V7: C71.1 C75.1 OLED8.6 OLED8.8 U22.5
3.3V8: C81.1 C85.1 OLED9.6 OLED9.8 U25.5
3.3V9: C91.1 C95.1 OLED10.6 OLED10.8 U28.5
3.3V10: C101.1 C105.1 OLED11.6 OLED11.8 U31.5
3.3V11: C111.1 C115.1 OLED12.6 OLED12.8 U34.5
3.3V12: C121.1 C125.1 OLED13.6 OLED13.8 U37.5
3.3V13: C131.1 C135.1 OLED14.6 OLED14.8 U40.5
3.3V14: C141.1 C145.1 OLED15.6 OLED15.8 U43.5
3.3V15: C151.1 C155.1 OLED16.6 OLED16.8 U46.5
3.3V16: C161.1 C165.1 OLED17.6 OLED17.8 U49.5
3.3V17: C171.1 C175.1 OLED18.6 OLED18.8 U52.5
3.3V18: C181.1 C185.1 OLED19.6 OLED19.8 U55.5
3.3V19: C191.1 C195.1 OLED20.6 OLED20.8 U58.5
5V: C4.1 C7.1 J2.15 R1.2 U2.5 U3.4 U3.6 U3.18
5V1: C13.1 C16.1 J4.15 R3.2 U5.5 U6.4 U6.6 U6.18
5V2: C23.1 C26.1 J7.15 R5.2 U8.5 U9.4 U9.6 U9.18
5V3: C33.1 C36.1 J10.15 R7.2 U11.5 U12.4 U12.6 U12.18
5V4: C43.1 C46.1 J13.15 R9.2 U14.5 U15.4 U15.6 U15.18
5V5: C53.1 C56.1 J16.15 R11.2 U17.5 U18.4 U18.6 U18.18
5V6: C63.1 C66.1 J19.15 R13.2 U20.5 U21.4 U21.6 U21.18
5V7: C73.1 C76.1 J22.15 R15.2 U23.5 U24.4 U24.6 U24.18
5V8: C83.1 C86.1 J25.15 R17.2 U26.5 U27.4 U27.6 U27.18
5V9: C93.1 C96.1 J28.15 R19.2 U29.5 U30.4 U30.6 U30.18
5V10: C103.1 C106.1 J31.15 R21.2 U32.5 U33.4 U33.6 U33.18
5V11: C113.1 C116.1 J34.15 R23.2 U35.5 U36.4 U36.6 U36.18
5V12: C123.1 C126.1 J37.15 R25.2 U38.5 U39.4 U39.6 U39.18
5V13: C133.1 C136.1 J40.15 R27.2 U41.5 U42.4 U42.6 U42.18
5V14: C143.1 C146.1 J43.15 R29.2 U44.5 U45.4 U45.6 U45.18
5V15: C153.1 C156.1 J46.15 R31.2 U47.5 U48.4 U48.6 U48.18
5V16: C163.1 C166.1 J49.15 R33.2 U50.5 U51.4 U51.6 U51.18
5V17: C173.1 C176.1 J52.15 R35.2 U53.5 U54.4 U54.6 U54.18
5V18: C183.1 C186.1 J55.15 R37.2 U56.5 U57.4 U57.6 U57.18
5V19: C193.1 C196.1 J58.15 R39.2 U59.5 U60.4 U60.6 U60.18
A0: J2.7 U3.23
A1: J2.6 U3.24
A2: J2.5 U3.25
A3: J2.4 U3.26
A4: J2.3 U3.27
A5: J2.2 U3.28
A6: J4.7 U6.23
A7: J4.6 U6.24
A8: J4.5 U6.25
A9: J4.4 U6.26
A10: J4.3 U6.27
A11: J4.2 U6.28
A12: J7.7 U9.23
A13: J7.6 U9.24
A14: J7.5 U9.25
A15: J7.4 U9.26
A16: J7.3 U9.27
A17: J7.2 U9.28
A18: J10.7 U12.23
A19: J10.6 U12.24
A20: J10.5 U12.25
A21: J10.4 U12.26
A22: J10.3 U12.27
A23: J10.2 U12.28
A24: J13.7 U15.23
A25: J13.6 U15.24
A26: J13.5 U15.25
A27: J13.4 U15.26
A28: J13.3 U15.27
A29: J13.2 U15.28
A30: J16.7 U18.23
A31: J16.6 U18.24
A32: J16.5 U18.25
A33: J16.4 U18.26
A34: J16.3 U18.27
A35: J16.2 U18.28
A36: J19.7 U21.23
A37: J19.6 U21.24
A38: J19.5 U21.25
A39: J19.4 U21.26
A40: J19.3 U21.27
A41: J19.2 U21.28
A42: J22.7 U24.23
A43: J22.6 U24.24
A44: J22.5 U24.25
A45: J22.4 U24.26
A46: J22.3 U24.27
A47: J22.2 U24.28
A48: J25.7 U27.23
A49: J25.6 U27.24
A50: J25.5 U27.25
A51: J25.4 U27.26
A52: J25.3 U27.27
A53: J25.2 U27.28
A54: J28.7 U30.23
A55: J28.6 U30.24
A56: J28.5 U30.25
A57: J28.4 U30.26
A58: J28.3 U30.27
A59: J28.2 U30.28
A60: J31.7 U33.23
A61: J31.6 U33.24
A62: J31.5 U33.25
A63: J31.4 U33.26
A64: J31.3 U33.27
A65: J31.2 U33.28
A66: J34.7 U36.23
A67: J34.6 U36.24
A68: J34.5 U36.25
A69: J34.4 U36.26
A70: J34.3 U36.27
A71: J34.2 U36.28
A72: J37.7 U39.23
A73: J37.6 U39.24
A74: J37.5 U39.25
A75: J37.4 U39.26
A76: J37.3 U39.27
A77: J37.2 U39.28
A78: J40.7 U42.23
A79: J40.6 U42.24
A80: J40.5 U42.25
A81: J40.4 U42.26
A82: J40.3 U42.27
A83: J40.2 U42.28
A84: J43.7 U45.23
A85: J43.6 U45.24
A86: J43.5 U45.25
A87: J43.4 U45.26
A88: J43.3 U45.27
A89: J43.2 U45.28
A90: J46.7 U48.23
A91: J46.6 U48.24
A92: J46.5 U48.25
A93: J46.4 U48.26
A94: J46.3 U48.27
A95: J46.2 U48.28
A96: J49.7 U51.23
A97: J49.6 U51.24
A98: J49.5 U51.25
A99: J49.4 U51.26
A100: J49.3 U51.27
A101: J49.2 U51.28
A102: J52.7 U54.23
A103: J52.6 U54.24
A104: J52.5 U54.25
A105: J52.4 U54.26
A106: J52.3 U54.27
A107: J52.2 U54.28
A108: J55.7 U57.23
A109: J55.6 U57.24
A110: J55.5 U57.25
A111: J55.4 U57.26
A112: J55.3 U57.27
A113: J55.2 U57.28
A114: J58.7 U60.23
A115: J58.6 U60.24
A116: J58.5 U60.25
A117: J58.4 U60.26
A118: J58.3 U60.27
A119: J58.2 U60.28
C1N: C6.2 OLED1.5
C1N1: C18.2 OLED2.5
C1N2: C28.2 OLED3.5
C1N3: C38.2 OLED4.5
C1N4: C48.2 OLED5.5
C1N5: C58.2 OLED6.5
C1N6: C68.2 OLED7.5
C1N7: C78.2 OLED8.5
C1N8: C88.2 OLED9.5
C1N9: C98.2 OLED10.5
C1N10: C108.2 OLED11.5
C1N11: C118.2 OLED12.5
C1N12: C128.2 OLED13.5
C1N13: C138.2 OLED14.5
C1N14: C148.2 OLED15.5
C1N15: C158.2 OLED16.5
C1N16: C168.2 OLED17.5
C1N17: C178.2 OLED18.5
C1N18: C188.2 OLED19.5
C1N19: C198.2 OLED20.5
C1P: C6.1 OLED1.4
C1P1: C18.1 OLED2.4
C1P2: C28.1 OLED3.4
C1P3: C38.1 OLED4.4
C1P4: C48.1 OLED5.4
C1P5: C58.1 OLED6.4
C1P6: C68.1 OLED7.4
C1P7: C78.1 OLED8.4
C1P8: C88.1 OLED9.4
C1P9: C98.1 OLED10.4
C1P10: C108.1 OLED11.4
C1P11: C118.1 OLED12.4
C1P12: C128.1 OLED13.4
C1P13: C138.1 OLED14.4
C1P14: C148.1 OLED15.4
C1P15: C158.1 OLED16.4
C1P16: C168.1 OLED17.4
C1P17: C178.1 OLED18.4
C1P18: C188.1 OLED19.4
C1P19: C198.1 OLED20.4
C2N: C5.2 OLED1.3
C2N1: C17.2 OLED2.3
C2N2: C27.2 OLED3.3
C2N3: C37.2 OLED4.3
C2N4: C47.2 OLED5.3
C2N5: C57.2 OLED6.3
C2N6: C67.2 OLED7.3
C2N7: C77.2 OLED8.3
C2N8: C87.2 OLED9.3
C2N9: C97.2 OLED10.3
C2N10: C107.2 OLED11.3
C2N11: C117.2 OLED12.3
C2N12: C127.2 OLED13.3
C2N13: C137.2 OLED14.3
C2N14: C147.2 OLED15.3
C2N15: C157.2 OLED16.3
C2N16: C167.2 OLED17.3
C2N17: C177.2 OLED18.3
C2N18: C187.2 OLED19.3
C2N19: C197.2 OLED20.3
C2P: C5.1 OLED1.2
C2P1: C17.1 OLED2.2
C2P2: C27.1 OLED3.2
C2P3: C37.1 OLED4.2
C2P4: C47.1 OLED5.2
C2P5: C57.1 OLED6.2
C2P6: C67.1 OLED7.2
C2P7: C77.1 OLED8.2
C2P8: C87.1 OLED9.2
C2P9: C97.1 OLED10.2
C2P10: C107.1 OLED11.2
C2P11: C117.1 OLED12.2
C2P12: C127.1 OLED13.2
C2P13: C137.1 OLED14.2
C2P14: C147.1 OLED15.2
C2P15: C157.1 OLED16.2
C2P16: C167.1 OLED17.2
C2P17: C177.1 OLED18.2
C2P18: C187.1 OLED19.2
C2P19: C197.1 OLED20.2
D1: J4.11 U6.32
D2: J2.11 U3.32
D3: J2.12 U3.1
D4: J4.12 U6.1
D5: J2.13 U3.9
D6: J2.14 U3.10
D7: J4.13 U6.9
D8: J4.14 U6.10
D8/D!C!: OLED1.13 U3.12
D8/D!C!1: OLED2.13 U6.12
D8/D!C!2: OLED3.13 U9.12
D8/D!C!3: OLED4.13 U12.12
D8/D!C!4: OLED5.13 U15.12
D8/D!C!5: OLED6.13 U18.12
D8/D!C!6: OLED7.13 U21.12
D8/D!C!7: OLED8.13 U24.12
D8/D!C!8: OLED9.13 U27.12
D8/D!C!9: OLED10.13 U30.12
D8/D!C!10: OLED11.13 U33.12
D8/D!C!11: OLED12.13 U36.12
D8/D!C!12: OLED13.13 U39.12
D8/D!C!13: OLED14.13 U42.12
D8/D!C!14: OLED15.13 U45.12
D8/D!C!15: OLED16.13 U48.12
D8/D!C!16: OLED17.13 U51.12
D8/D!C!17: OLED18.13 U54.12
D8/D!C!18: OLED19.13 U57.12
D8/D!C!19: OLED20.13 U60.12
D9: J7.11 U9.32
D10: J7.12 U9.1
D10/SS: OLED1.11 U3.14
D10/SS1: OLED2.11 U6.14
D10/SS2: OLED3.11 U9.14
D10/SS3: OLED4.11 U12.14
D10/SS4: OLED5.11 U15.14
D10/SS5: OLED6.11 U18.14
D10/SS6: OLED7.11 U21.14
D10/SS7: OLED8.11 U24.14
D10/SS8: OLED9.11 U27.14
D10/SS9: OLED10.11 U30.14
D10/SS10: OLED11.11 U33.14
D10/SS11: OLED12.11 U36.14
D10/SS12: OLED13.11 U39.14
D10/SS13: OLED14.11 U42.14
D10/SS14: OLED15.11 U45.14
D10/SS15: OLED16.11 U48.14
D10/SS16: OLED17.11 U51.14
D10/SS17: OLED18.11 U54.14
D10/SS18: OLED19.11 U57.14
D10/SS19: OLED20.11 U60.14
D11: J7.13 U9.9
D11/MOSI: J3.1 OLED1.17 U3.15
D11/MOSI1: J6.1 OLED2.17 U6.15
D11/MOSI2: J9.1 OLED3.17 U9.15
D11/MOSI3: J12.1 OLED4.17 U12.15
D11/MOSI4: J15.1 OLED5.17 U15.15
D11/MOSI5: J18.1 OLED6.17 U18.15
D11/MOSI6: J21.1 OLED7.17 U21.15
D11/MOSI7: J24.1 OLED8.17 U24.15
D11/MOSI8: J27.1 OLED9.17 U27.15
D11/MOSI9: J30.1 OLED10.17 U30.15
D11/MOSI10: J33.1 OLED11.17 U33.15
D11/MOSI11: J36.1 OLED12.17 U36.15
D11/MOSI12: J39.1 OLED13.17 U39.15
D11/MOSI13: J42.1 OLED14.17 U42.15
D11/MOSI14: J45.1 OLED15.17 U45.15
D11/MOSI15: J48.1 OLED16.17 U48.15
D11/MOSI16: J51.1 OLED17.17 U51.15
D11/MOSI17: J54.1 OLED18.17 U54.15
D11/MOSI18: J57.1 OLED19.17 U57.15
D11/MOSI19: J60.1 OLED20.17 U60.15
D12: J7.14 U9.10
D12/MISO: J3.2 OLED1.12 U3.16
D12/MISO1: J6.2 OLED2.12 U6.16
D12/MISO2: J9.2 OLED3.12 U9.16
D12/MISO3: J12.2 OLED4.12 U12.16
D12/MISO4: J15.2 OLED5.12 U15.16
D12/MISO5: J18.2 OLED6.12 U18.16
D12/MISO6: J21.2 OLED7.12 U21.16
D12/MISO7: J24.2 OLED8.12 U24.16
D12/MISO8: J27.2 OLED9.12 U27.16
D12/MISO9: J30.2 OLED10.12 U30.16
D12/MISO10: J33.2 OLED11.12 U33.16
D12/MISO11: J36.2 OLED12.12 U36.16
D12/MISO12: J39.2 OLED13.12 U39.16
D12/MISO13: J42.2 OLED14.12 U42.16
D12/MISO14: J45.2 OLED15.12 U45.16
D12/MISO15: J48.2 OLED16.12 U48.16
D12/MISO16: J51.2 OLED17.12 U51.16
D12/MISO17: J54.2 OLED18.12 U54.16
D12/MISO18: J57.2 OLED19.12 U57.16
D12/MISO19: J60.2 OLED20.12 U60.16
D13: J10.11 U12.32
D13/SCK: J3.3 OLED1.16 U3.17
D13/SCK1: J6.3 OLED2.16 U6.17
D13/SCK2: J9.3 OLED3.16 U9.17
D13/SCK3: J12.3 OLED4.16 U12.17
D13/SCK4: J15.3 OLED5.16 U15.17
D13/SCK5: J18.3 OLED6.16 U18.17
D13/SCK6: J21.3 OLED7.16 U21.17
D13/SCK7: J24.3 OLED8.16 U24.17
D13/SCK8: J27.3 OLED9.16 U27.17
D13/SCK9: J30.3 OLED10.16 U30.17
D13/SCK10: J33.3 OLED11.16 U33.17
D13/SCK11: J36.3 OLED12.16 U36.17
D13/SCK12: J39.3 OLED13.16 U39.17
D13/SCK13: J42.3 OLED14.16 U42.17
D13/SCK14: J45.3 OLED15.16 U45.17
D13/SCK15: J48.3 OLED16.16 U48.17
D13/SCK16: J51.3 OLED17.16 U51.17
D13/SCK17: J54.3 OLED18.16 U54.17
D13/SCK18: J57.3 OLED19.16 U57.17
D13/SCK19: J60.3 OLED20.16 U60.17
D14: J10.12 U12.1
D15: J10.13 U12.9
D16: J10.14 U12.10
D17: J13.11 U15.32
D18: J13.12 U15.1
D19: J13.13 U15.9
D20: J13.14 U15.10
D21: J16.11 U18.32
D22: J16.12 U18.1
D23: J16.13 U18.9
D24: J16.14 U18.10
D25: J19.11 U21.32
D26: J19.12 U21.1
D27: J19.13 U21.9
D28: J19.14 U21.10
D29: J22.11 U24.32
D30: J22.12 U24.1
D31: J22.13 U24.9
D32: J22.14 U24.10
D33: J25.11 U27.32
D34: J25.12 U27.1
D35: J25.13 U27.9
D36: J25.14 U27.10
D37: J28.11 U30.32
D38: J28.12 U30.1
D39: J28.13 U30.9
D40: J28.14 U30.10
D41: J31.11 U33.32
D42: J31.12 U33.1
D43: J31.13 U33.9
D44: J31.14 U33.10
D45: J34.11 U36.32
D46: J34.12 U36.1
D47: J34.13 U36.9
D48: J34.14 U36.10
D49: J37.11 U39.32
D50: J37.12 U39.1
D51: J37.13 U39.9
D52: J37.14 U39.10
D53: J40.11 U42.32
D54: J40.12 U42.1
D55: J40.13 U42.9
D56: J40.14 U42.10
D57: J43.11 U45.32
D58: J43.12 U45.1
D59: J43.13 U45.9
D60: J43.14 U45.10
D61: J46.11 U48.32
D62: J46.12 U48.1
D63: J46.13 U48.9
D64: J46.14 U48.10
D65: J49.11 U51.32
D66: J49.12 U51.1
D67: J49.13 U51.9
D68: J49.14 U51.10
D69: J52.11 U54.32
D70: J52.12 U54.1
D71: J52.13 U54.9
D72: J52.14 U54.10
D73: J55.11 U57.32
D74: J55.12 U57.1
D75: J55.13 U57.9
D76: J55.14 U57.10
D77: J58.11 U60.32
D78: J58.12 U60.1
D79: J58.13 U60.9
D80: J58.14 U60.10
GND: C1.2 C2.2 C3.2 C4.2 C7.2 C8.2 C9.2 C10.2 J2.8 OLED1.1 OLED1.7 OLED1.9 OLED1.10 OLED1.27 OLED1.28 R2.1 U1.2 U2.2 U3.3 U3.5 U3.21 Y1.2
GND1: C11.2 C12.2 C13.2 C14.2 C15.2 C16.2 C19.2 C20.2 J4.8 OLED2.1 OLED2.7 OLED2.9 OLED2.10 OLED2.27 OLED2.28 R4.1 U4.2 U5.2 U6.3 U6.5 U6.21 Y2.2
GND2: C21.2 C22.2 C23.2 C24.2 C25.2 C26.2 C29.2 C30.2 J7.8 OLED3.1 OLED3.7 OLED3.9 OLED3.10 OLED3.27 OLED3.28 R6.1 U7.2 U8.2 U9.3 U9.5 U9.21 Y3.2
GND3: C31.2 C32.2 C33.2 C34.2 C35.2 C36.2 C39.2 C40.2 J10.8 OLED4.1 OLED4.7 OLED4.9 OLED4.10 OLED4.27 OLED4.28 R8.1 U10.2 U11.2 U12.3 U12.5 U12.21 Y4.2
GND4: C41.2 C42.2 C43.2 C44.2 C45.2 C46.2 C49.2 C50.2 J13.8 OLED5.1 OLED5.7 OLED5.9 OLED5.10 OLED5.27 OLED5.28 R10.1 U13.2 U14.2 U15.3 U15.5 U15.21 Y5.2
GND5: C51.2 C52.2 C53.2 C54.2 C55.2 C56.2 C59.2 C60.2 J16.8 OLED6.1 OLED6.7 OLED6.9 OLED6.10 OLED6.27 OLED6.28 R12.1 U16.2 U17.2 U18.3 U18.5 U18.21 Y6.2
GND6: C61.2 C62.2 C63.2 C64.2 C65.2 C66.2 C69.2 C70.2 J19.8 OLED7.1 OLED7.7 OLED7.9 OLED7.10 OLED7.27 OLED7.28 R14.1 U19.2 U20.2 U21.3 U21.5 U21.21 Y7.2
GND7: C71.2 C72.2 C73.2 C74.2 C75.2 C76.2 C79.2 C80.2 J22.8 OLED8.1 OLED8.7 OLED8.9 OLED8.10 OLED8.27 OLED8.28 R16.1 U22.2 U23.2 U24.3 U24.5 U24.21 Y8.2
GND8: C81.2 C82.2 C83.2 C84.2 C85.2 C86.2 C89.2 C90.2 J25.8 OLED9.1 OLED9.7 OLED9.9 OLED9.10 OLED9.27 OLED9.28 R18.1 U25.2 U26.2 U27.3 U27.5 U27.21 Y9.2
GND9: C91.2 C92.2 C93.2 C94.2 C95.2 C96.2 C99.2 C100.2 J28.8 OLED10.1 OLED10.7 OLED10.9 OLED10.10 OLED10.27 OLED10.28 R20.1 U28.2 U29.2 U30.3 U30.5 U30.21 Y10.2
GND10: C101.2 C102.2 C103.2 C104.2 C105.2 C106.2 C109.2 C110.2 J31.8 OLED11.1 OLED11.7 OLED11.9 OLED11.10 OLED11.27 OLED11.28 R22.1 U31.2 U32.2 U33.3 U33.5 U33.21 Y11.2
GND11: C111.2 C112.2 C113.2 C114.2 C115.2 C116.2 C119.2 C120.2 J34.8 OLED12.1 OLED12.7 OLED12.9 OLED12.10 OLED12.27 OLED12.28 R24.1 U34.2 U35.2 U36.3 U36.5 U36.21 Y12.2
GND12: C121.2 C122.2 C123.2 C124.2 C125.2 C126.2 C129.2 C130.2 J37.8 OLED13.1 OLED13.7 OLED13.9 OLED13.10 OLED13.27 OLED13.28 R26.1 U37.2 U38.2 U39.3 U39.5 U39.21 Y13.2
GND13: C131.2 C132.2 C133.2 C134.2 C135.2 C136.2 C139.2 C140.2 J40.8 OLED14.1 OLED14.7 OLED14.9 OLED14.10 OLED14.27 OLED14.28 R28.1 U40.2 U41.2 U42.3 U42.5 U42.21 Y14.2
GND14: C141.2 C142.2 C143.2 C144.2 C145.2 C146.2 C149.2 C150.2 J43.8 OLED15.1 OLED15.7 OLED15.9 OLED15.10 OLED15.27 OLED15.28 R30.1 U43.2 U44.2 U45.3 U45.5 U45.21 Y15.2
GND15: C151.2 C152.2 C153.2 C154.2 C155.2 C156.2 C159.2 C160.2 J46.8 OLED16.1 OLED16.7 OLED16.9 OLED16.10 OLED16.27 OLED16.28 R32.1 U46.2 U47.2 U48.3 U48.5 U48.21 Y16.2
GND16: C161.2 C162.2 C163.2 C164.2 C165.2 C166.2 C169.2 C170.2 J49.8 OLED17.1 OLED17.7 OLED17.9 OLED17.10 OLED17.27 OLED17.28 R34.1 U49.2 U50.2 U51.3 U51.5 U51.21 Y17.2
GND17: C171.2 C172.2 C173.2 C174.2 C175.2 C176.2 C179.2 C180.2 J52.8 OLED18.1 OLED18.7 OLED18.9 OLED18.10 OLED18.27 OLED18.28 R36.1 U52.2 U53.2 U54.3 U54.5 U54.21 Y18.2
GND18: C181.2 C182.2 C183.2 C184.2 C185.2 C186.2 C189.2 C190.2 J55.8 OLED19.1 OLED19.7 OLED19.9 OLED19.10 OLED19.27 OLED19.28 R38.1 U55.2 U56.2 U57.3 U57.5 U57.21 Y19.2
GND19: C191.2 C192.2 C193.2 C194.2 C195.2 C196.2 C199.2 C200.2 J58.8 OLED20.1 OLED20.7 OLED20.9 OLED20.10 OLED20.27 OLED20.28 R40.1 U58.2 U59.2 U60.3 U60.5 U60.21 Y20.2
N$1: C10.1 OLED1.26
N$2: C9.1 OLED1.25
N$3: OLED1.24 R2.2
N$4: C19.1 OLED2.26
N$5: C20.1 OLED2.25
N$6: OLED2.24 R4.2
N$7: U6.7 Y2.1
N$8: U3.7 Y1.1
N$9: U3.8 Y1.3
N$10: C8.1 U3.20
N$11: U6.8 Y2.3
N$12: C12.1 U6.20
N$13: C29.1 OLED3.26
N$14: C30.1 OLED3.25
N$15: OLED3.24 R6.2
N$16: U9.7 Y3.1
N$17: U9.8 Y3.3
N$18: C22.1 U9.20
N$19: C39.1 OLED4.26
N$20: C40.1 OLED4.25
N$21: OLED4.24 R8.2
N$22: U12.7 Y4.1
N$23: U12.8 Y4.3
N$24: C32.1 U12.20
N$25: C49.1 OLED5.26
N$26: C50.1 OLED5.25
N$27: OLED5.24 R10.2
N$28: U15.7 Y5.1
N$29: U15.8 Y5.3
N$30: C42.1 U15.20
N$31: C59.1 OLED6.26
N$32: C60.1 OLED6.25
N$33: OLED6.24 R12.2
N$34: U18.7 Y6.1
N$35: U18.8 Y6.3
N$36: C52.1 U18.20
N$37: C69.1 OLED7.26
N$38: C70.1 OLED7.25
N$39: OLED7.24 R14.2
N$40: U21.7 Y7.1
N$41: U21.8 Y7.3
N$42: C62.1 U21.20
N$43: C79.1 OLED8.26
N$44: C80.1 OLED8.25
N$45: OLED8.24 R16.2
N$46: U24.7 Y8.1
N$47: U24.8 Y8.3
N$48: C72.1 U24.20
N$49: C89.1 OLED9.26
N$50: C90.1 OLED9.25
N$51: OLED9.24 R18.2
N$52: U27.7 Y9.1
N$53: U27.8 Y9.3
N$54: C82.1 U27.20
N$55: C99.1 OLED10.26
N$56: C100.1 OLED10.25
N$57: OLED10.24 R20.2
N$58: U30.7 Y10.1
N$59: U30.8 Y10.3
N$60: C92.1 U30.20
N$61: C109.1 OLED11.26
N$62: C110.1 OLED11.25
N$63: OLED11.24 R22.2
N$64: U33.7 Y11.1
N$65: U33.8 Y11.3
N$66: C102.1 U33.20
N$67: C119.1 OLED12.26
N$68: C120.1 OLED12.25
N$69: OLED12.24 R24.2
N$70: U36.7 Y12.1
N$71: U36.8 Y12.3
N$72: C112.1 U36.20
N$73: C129.1 OLED13.26
N$74: C130.1 OLED13.25
N$75: OLED13.24 R26.2
N$76: U39.7 Y13.1
N$77: U39.8 Y13.3
N$78: C122.1 U39.20
N$79: C139.1 OLED14.26
N$80: C140.1 OLED14.25
N$81: OLED14.24 R28.2
N$82: U42.7 Y14.1
N$83: U42.8 Y14.3
N$84: C132.1 U42.20
N$85: C149.1 OLED15.26
N$86: C150.1 OLED15.25
N$87: OLED15.24 R30.2
N$88: U45.7 Y15.1
N$89: U45.8 Y15.3
N$90: C142.1 U45.20
N$91: C159.1 OLED16.26
N$92: C160.1 OLED16.25
N$93: OLED16.24 R32.2
N$94: U48.7 Y16.1
N$95: U48.8 Y16.3
N$96: C152.1 U48.20
N$97: C169.1 OLED17.26
N$98: C170.1 OLED17.25
N$99: OLED17.24 R34.2
N$100: U51.7 Y17.1
N$101: U51.8 Y17.3
N$102: C162.1 U51.20
N$103: C179.1 OLED18.26
N$104: C180.1 OLED18.25
N$105: OLED18.24 R36.2
N$106: U54.7 Y18.1
N$107: U54.8 Y18.3
N$108: C172.1 U54.20
N$109: C189.1 OLED19.26
N$110: C190.1 OLED19.25
N$111: OLED19.24 R38.2
N$112: U57.7 Y19.1
N$113: U57.8 Y19.3
N$114: C182.1 U57.20
N$115: C199.1 OLED20.26
N$116: C200.1 OLED20.25
N$117: OLED20.24 R40.2
N$118: U60.7 Y20.1
N$119: U60.8 Y20.3
N$120: C192.1 U60.20
RESET: J2.1 R1.1 U3.29
RESET1: J4.1 R3.1 U6.29
RESET2: J7.1 R5.1 U9.29
RESET3: J10.1 R7.1 U12.29
RESET4: J13.1 R9.1 U15.29
RESET5: J16.1 R11.1 U18.29
RESET6: J19.1 R13.1 U21.29
RESET7: J22.1 R15.1 U24.29
RESET8: J25.1 R17.1 U27.29
RESET9: J28.1 R19.1 U30.29
RESET10: J31.1 R21.1 U33.29
RESET11: J34.1 R23.1 U36.29
RESET12: J37.1 R25.1 U39.29
RESET13: J40.1 R27.1 U42.29
RESET14: J43.1 R29.1 U45.29
RESET15: J46.1 R31.1 U48.29
RESET16: J49.1 R33.1 U51.29
RESET17: J52.1 R35.1 U54.29
RESET18: J55.1 R37.1 U57.29
RESET19: J58.1 R39.1 U60.29
RXD: J2.9 U3.30
RXD1: J4.9 U6.30
RXD2: J7.9 U9.30
RXD3: J10.9 U12.30
RXD4: J13.9 U15.30
RXD5: J16.9 U18.30
RXD6: J19.9 U21.30
RXD7: J22.9 U24.30
RXD8: J25.9 U27.30
RXD9: J28.9 U30.30
RXD10: J31.9 U33.30
RXD11: J34.9 U36.30
RXD12: J37.9 U39.30
RXD13: J40.9 U42.30
RXD14: J43.9 U45.30
RXD15: J46.9 U48.30
RXD16: J49.9 U51.30
RXD17: J52.9 U54.30
RXD18: J55.9 U57.30
RXD19: J58.9 U60.30
TXD: J2.10 U3.31
TXD1: J4.10 U6.31
TXD2: J7.10 U9.31
TXD3: J10.10 U12.31
TXD4: J13.10 U15.31
TXD5: J16.10 U18.31
TXD6: J19.10 U21.31
TXD7: J22.10 U24.31
TXD8: J25.10 U27.31
TXD9: J28.10 U30.31
TXD10: J31.10 U33.31
TXD11: J34.10 U36.31
TXD12: J37.10 U39.31
TXD13: J40.10 U42.31
TXD14: J43.10 U45.31
TXD15: J46.10 U48.31
TXD16: J49.10 U51.31
TXD17: J52.10 U54.31
TXD18: J55.10 U57.31
TXD19: J58.10 U60.31
VIN: C1.1 J2.16 U1.1 U1.3 U2.1 U2.3
VIN1: C14.1 J4.16 U4.1 U4.3 U5.1 U5.3
VIN2: C24.1 J7.16 U7.1 U7.3 U8.1 U8.3
VIN3: C34.1 J10.16 U10.1 U10.3 U11.1 U11.3
VIN4: C44.1 J13.16 U13.1 U13.3 U14.1 U14.3
VIN5: C54.1 J16.16 U16.1 U16.3 U17.1 U17.3
VIN6: C64.1 J19.16 U19.1 U19.3 U20.1 U20.3
VIN7: C74.1 J22.16 U22.1 U22.3 U23.1 U23.3
VIN8: C84.1 J25.16 U25.1 U25.3 U26.1 U26.3
VIN9: C94.1 J28.16 U28.1 U28.3 U29.1 U29.3
VIN10: C104.1 J31.16 U31.1 U31.3 U32.1 U32.3
VIN11: C114.1 J34.16 U34.1 U34.3 U35.1 U35.3
VIN12: C124.1 J37.16 U37.1 U37.3 U38.1 U38.3
VIN13: C134.1 J40.16 U40.1 U40.3 U41.1 U41.3
VIN14: C144.1 J43.16 U43.1 U43.3 U44.1 U44.3
VIN15: C154.1 J46.16 U46.1 U46.3 U47.1 U47.3
VIN16: C164.1 J49.16 U49.1 U49.3 U50.1 U50.3
VIN17: C174.1 J52.16 U52.1 U52.3 U53.1 U53.3
VIN18: C184.1 J55.16 U55.1 U55.3 U56.1 U56.3
VIN19: C194.1 J58.16 U58.1 U58.3 U59.1 U59.3

## Tracks (layer width: path | path; a pad name or v marks a point on that pad's centre or on a via)
3.3V  (via drill 0.38)
  Top 0.203: v10.67,16.26 11.5,15.42 OLED1.6 11.5,13.01 11.94,12.57 12.57,12.57 12.8,12.8 OLED1.8
  Bottom 0.203: U1.5 10.86,16.07 v10.67,16.26
  Bottom 0.254: U1.5 11.97,15.52 11.52,15.07 C3.1 C2.1
3.3V1  (via drill 0.38)
  Top 0.203: v31.5,16.26 32.33,15.42 OLED2.6 32.33,13.01 32.77,12.57 33.4,12.57 33.63,12.8 OLED2.8
  Bottom 0.203: U4.5 31.68,16.07 v31.5,16.26
  Bottom 0.254: U4.5 32.8,15.52 32.35,15.07 C11.1 C15.1
3.3V2  (via drill 0.38)
  Top 0.203: v52.32,16.26 53.16,15.42 OLED3.6 53.16,13.01 53.59,12.57 54.23,12.57 54.46,12.8 OLED3.8
  Bottom 0.203: U7.5 52.51,16.07 v52.32,16.26
  Bottom 0.254: U7.5 53.62,15.52 53.17,15.07 C21.1 C25.1
3.3V3  (via drill 0.38)
  Top 0.203: v73.15,16.26 73.99,15.42 OLED4.6 73.99,13.01 74.42,12.57 75.06,12.57 75.29,12.8 OLED4.8
  Bottom 0.203: U10.5 73.34,16.07 v73.15,16.26
  Bottom 0.254: U10.5 74.45,15.52 74,15.07 C31.1 C35.1
3.3V4  (via drill 0.38)
  Top 0.203: v93.98,16.26 94.82,15.42 OLED5.6 94.82,13.01 95.25,12.57 95.89,12.57 96.12,12.8 OLED5.8
  Bottom 0.203: U13.5 94.17,16.07 v93.98,16.26
  Bottom 0.254: U13.5 95.28,15.52 94.83,15.07 C41.1 C45.1
3.3V5  (via drill 0.38)
  Top 0.203: v10.67,37.08 11.5,36.25 OLED6.6 11.5,33.83 11.94,33.4 12.57,33.4 12.8,33.63 OLED6.8
  Bottom 0.203: U16.5 10.86,36.9 v10.67,37.08
  Bottom 0.254: U16.5 11.97,36.35 11.52,35.9 C51.1 C55.1
3.3V6  (via drill 0.38)
  Top 0.203: v31.5,37.08 32.33,36.25 OLED7.6 32.33,33.83 32.77,33.4 33.4,33.4 33.63,33.63 OLED7.8
  Bottom 0.203: U19.5 31.68,36.9 v31.5,37.08
  Bottom 0.254: U19.5 32.8,36.35 32.35,35.9 C61.1 C65.1
3.3V7  (via drill 0.38)
  Top 0.203: v52.32,37.08 53.16,36.25 OLED8.6 53.16,33.83 53.59,33.4 54.23,33.4 54.46,33.63 OLED8.8
  Bottom 0.203: U22.5 52.51,36.9 v52.32,37.08
  Bottom 0.254: U22.5 53.62,36.35 53.17,35.9 C71.1 C75.1
3.3V8  (via drill 0.38)
  Top 0.203: v73.15,37.08 73.99,36.25 OLED9.6 73.99,33.83 74.42,33.4 75.06,33.4 75.29,33.63 OLED9.8
  Bottom 0.203: U25.5 73.34,36.9 v73.15,37.08
  Bottom 0.254: U25.5 74.45,36.35 74,35.9 C81.1 C85.1
3.3V9  (via drill 0.38)
  Top 0.203: v93.98,37.08 94.82,36.25 OLED10.6 94.82,33.83 95.25,33.4 95.89,33.4 96.12,33.63 OLED10.8
  Bottom 0.203: U28.5 94.17,36.9 v93.98,37.08
  Bottom 0.254: U28.5 95.28,36.35 94.83,35.9 C91.1 C95.1
3.3V10  (via drill 0.38)
  Top 0.203: v10.67,57.91 11.5,57.07 OLED11.6 11.5,54.66 11.94,54.23 12.57,54.23 12.8,54.46 OLED11.8
  Bottom 0.203: U31.5 10.86,57.72 v10.67,57.91
  Bottom 0.254: U31.5 11.97,57.18 11.52,56.73 C101.1 C105.1
3.3V11  (via drill 0.38)
  Top 0.203: v31.5,57.91 32.33,57.07 OLED12.6 32.33,54.66 32.77,54.23 33.4,54.23 33.63,54.46 OLED12.8
  Bottom 0.203: U34.5 31.68,57.72 v31.5,57.91
  Bottom 0.254: U34.5 32.8,57.18 32.35,56.73 C111.1 C115.1
3.3V12  (via drill 0.38)
  Top 0.203: v52.32,57.91 53.16,57.07 OLED13.6 53.16,54.66 53.59,54.23 54.23,54.23 54.46,54.46 OLED13.8